# EAGLE board Control (EAGLE 9.1.0)
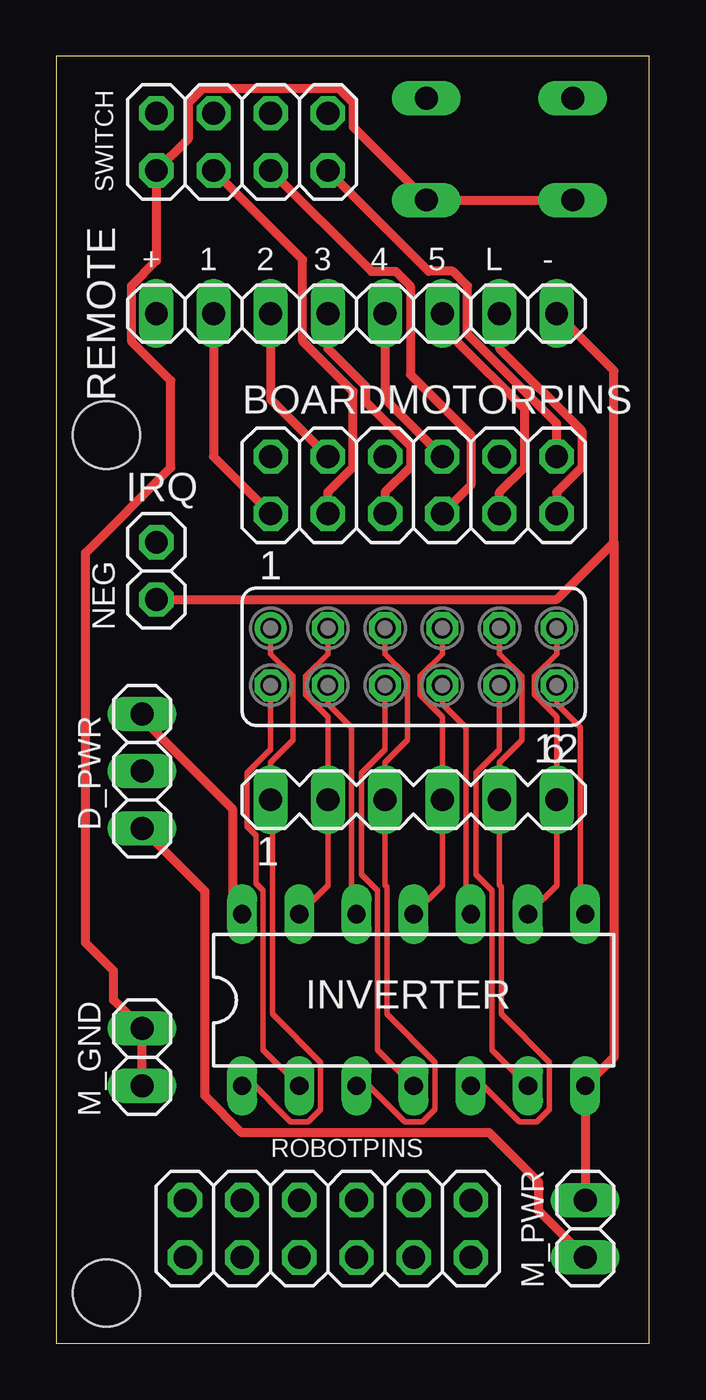
[diagram p0: board, top side]
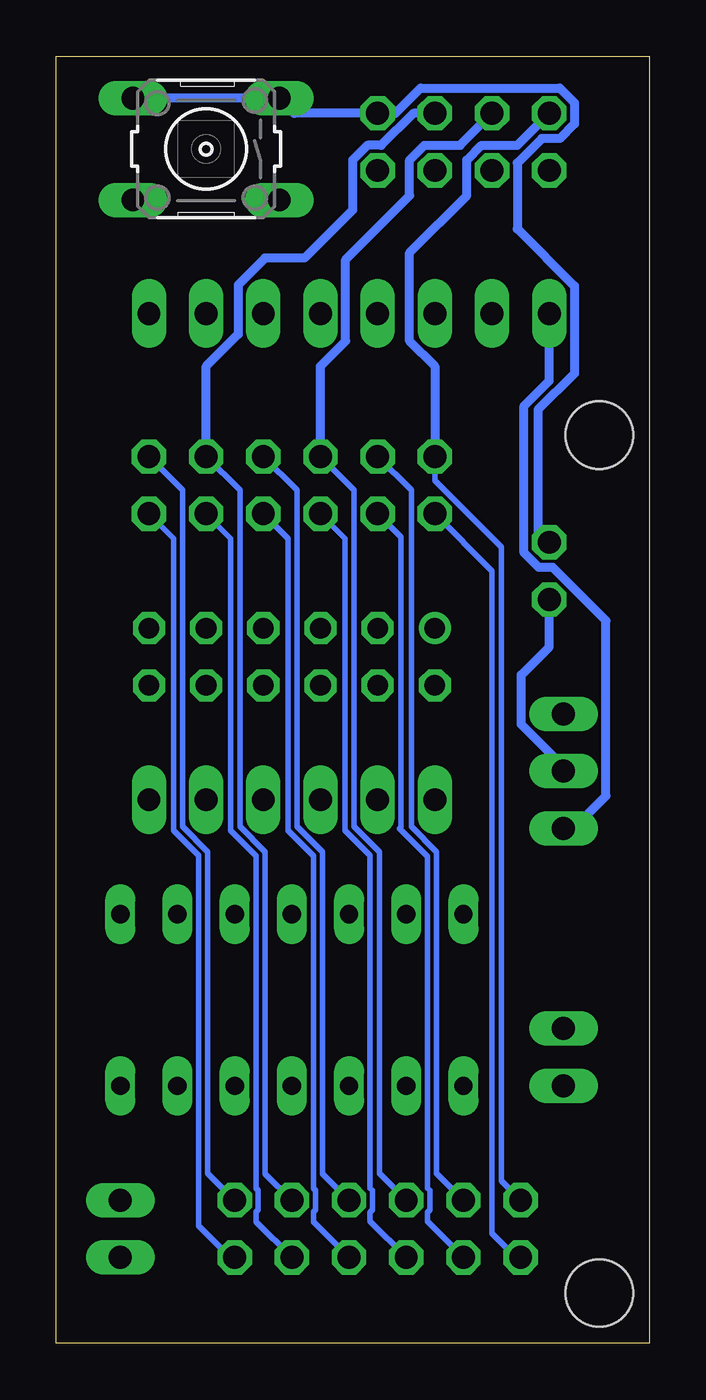
[diagram p1: board, bottom side, seen from below]

Size 26.34 x 57.14 mm. Coordinates in mm from the lower left corner, seen from the top.
Outline: 0,0 26.34,0 26.34,57.14 0,57.14 0,0
Copper layers (1*16): Top 0.035mm / dielectric 1.5mm / Bottom 0.035mm
Design rules "default": minimum track width 6mil, minimum drill 0.35mm, track to track 6mil, track to pad 6mil, pad to pad 6mil, via to via 6mil, smd to smd 6mil, copper to edge 40mil, drill to drill 6mil, minimum pad ring 10mil, minimum via ring 8mil, stop-mask expansion 4mil, vias tented up to drill 0mil, thermal gap 10mil
Holes 3 mm at 2.22,2.22 2.22,40.32

## Footprints (pad centres in the part's own frame; a part is rotated, then mirrored left to right if it is on the bottom)
2X06 = drill 1.016 octagon: 1 -6.35,-1.27; 2 -6.35,1.27; 3 -3.81,-1.27; 4 -3.81,1.27; 5 -1.27,-1.27; 6 -1.27,1.27; 7 1.27,-1.27; 8 1.27,1.27; 9 3.81,-1.27; 10 3.81,1.27; 11 6.35,-1.27; 12 6.35,1.27
1X03 = drill 1.016 long: 1 -2.54,0; 2 0,0; 3 2.54,0
MA06-1 = drill 1.016 long: 1 -6.35,0; 2 -3.81,0; 3 -1.27,0; 4 1.27,0; 5 3.81,0; 6 6.35,0
DIL14 = drill 0.813 long: 1 -7.62,-3.81; 2 -5.08,-3.81; 3 -2.54,-3.81; 4 0,-3.81; 5 2.54,-3.81; 6 5.08,-3.81; 7 7.62,-3.81; 8 7.62,3.81; 9 5.08,3.81; 10 2.54,3.81; 11 0,3.81; 12 -2.54,3.81; 13 -5.08,3.81; 14 -7.62,3.81
1X01 = drill 1.016 octagon: 1 0,0
1X02 = drill 1.016 long: 1 -1.27,0; 2 1.27,0
1X08 = drill 1.016 long: 1 -8.89,0; 2 -6.35,0; 3 -3.81,0; 4 -1.27,0; 5 1.27,0; 6 3.81,0; 7 6.35,0; 8 8.89,0
B3F-10XX = drill 1.016 long: 1 -3.251,2.261; 2 3.251,2.261; 3 -3.251,-2.261; 4 3.251,-2.261
2X04 = drill 1.016 octagon: 1 -3.81,-1.27; 2 -3.81,1.27; 3 -1.27,-1.27; 4 -1.27,1.27; 5 1.27,-1.27; 6 1.27,1.27; 7 3.81,-1.27; 8 3.81,1.27
FE06-2 = drill 0.914: 1 -6.35,1.27 | drill 0.914 octagon: 2 -6.35,-1.27; 3 -3.81,1.27; 4 -3.81,-1.27; 5 -1.27,1.27; 6 -1.27,-1.27; 7 1.27,1.27; 8 1.27,-1.27; 9 3.81,1.27; 10 3.81,-1.27; 11 6.35,1.27; 12 6.35,-1.27

## Placement (x,y rotation side)
BOARDMOTORPINS  [2X06]  15.88,38.1 0 top
D_PWR  [1X03]  3.81,25.4 90 top
DIGITAL_IN  [MA06-1]  15.88,24.13 0 top
INVERTER  74LS04N  [DIL14]  15.88,15.24 0 top
IRQ  [1X01]  4.45,35.56 0 top
M_GND  [1X02]  3.81,12.7 90 top
M_PWR  [1X02]  23.49,5.08 90 top
NEG  [1X01]  4.45,33.02 90 top
REMOTE  [1X08]  13.34,45.72 0 top
ROBOTPINS  [2X06]  12.06,5.08 0 top
S1  [B3F-10XX]  19.68,53.02 180 bottom
SWITCH  [2X04]  8.26,53.34 0 top
TOBOARD  [FE06-2]  15.88,30.48 0 top

## Library data of the parts
BOARDMOTORPINS D_PWR IRQ M_GND M_PWR NEG REMOTE ROBOTPINS SWITCH = pinhead
DIGITAL_IN = con-lstb; OC_FARNELL: unknown; OC_NEWARK: unknown
INVERTER = 74xx-us
S1 = switch-omron; MPN: B3F-1000; OC_FARNELL: 176432; OC_NEWARK: 36M3542
TOBOARD = con-lsta; OC_FARNELL: unknown; OC_NEWARK: unknown

## Nets
GND: D_PWR.2 INVERTER.7 M_PWR.2 NEG.1 REMOTE.8
N$1: DIGITAL_IN.6 INVERTER.9 TOBOARD.11
N$2: DIGITAL_IN.4 INVERTER.11 TOBOARD.7
N$3: DIGITAL_IN.2 INVERTER.13 TOBOARD.3
N$4: DIGITAL_IN.1 INVERTER.1 TOBOARD.1
N$5: DIGITAL_IN.3 INVERTER.3 TOBOARD.5
N$6: DIGITAL_IN.5 INVERTER.5 TOBOARD.9
N$7: INVERTER.2 TOBOARD.2
N$8: INVERTER.4 TOBOARD.6
N$9: INVERTER.6 TOBOARD.10
N$10: INVERTER.8 TOBOARD.12
N$11: INVERTER.10 TOBOARD.8
N$12: INVERTER.12 TOBOARD.4
N$13: BOARDMOTORPINS.1 REMOTE.2 ROBOTPINS.1
N$14: BOARDMOTORPINS.3 ROBOTPINS.3 SWITCH.3
N$15: BOARDMOTORPINS.5 REMOTE.4 ROBOTPINS.5
N$16: BOARDMOTORPINS.7 ROBOTPINS.7 SWITCH.5
N$17: BOARDMOTORPINS.9 REMOTE.6 ROBOTPINS.9
N$18: BOARDMOTORPINS.11 REMOTE.7 ROBOTPINS.11
N$19: BOARDMOTORPINS.12 ROBOTPINS.12 SWITCH.7
N$20: BOARDMOTORPINS.10 ROBOTPINS.10 SWITCH.6
N$21: BOARDMOTORPINS.8 REMOTE.5 ROBOTPINS.8
N$22: BOARDMOTORPINS.2 ROBOTPINS.2 SWITCH.2
N$23: BOARDMOTORPINS.4 REMOTE.3 ROBOTPINS.4
N$24: BOARDMOTORPINS.6 ROBOTPINS.6 SWITCH.4
N$25: D_PWR.1 M_PWR.1 REMOTE.1
N$26: M_GND.1 M_GND.2 S1.1 S1.2 SWITCH.1
N$27: IRQ.1 S1.3 S1.4 SWITCH.8
VCC: D_PWR.3 INVERTER.14

## Tracks (layer width: path | path; a pad name or v marks a point on that pad's centre or on a via)
GND
  Top 0.406: M_PWR.2 INVERTER.7 24.76,12.7 24.76,35.56 | 24.76,35.56 24.76,43.18 REMOTE.8 | NEG.1 22.22,33.02 24.76,35.56
  Bottom 0.406: D_PWR.2 3.81,25.6 5.69,27.48 5.69,29.67 4.45,30.92 NEG.1
N$1
  Top 0.254: INVERTER.9 22.22,20.32 DIGITAL_IN.6 22.22,27.81 21.23,28.8 21.23,29.62 22.22,30.61 TOBOARD.11
N$2
  Top 0.254: INVERTER.11 17.14,20.32 DIGITAL_IN.4 17.14,27.81 16.15,28.8 16.15,29.62 17.14,30.61 TOBOARD.7
N$3
  Top 0.254: INVERTER.13 12.06,20.32 DIGITAL_IN.2 12.06,27.81 11.07,28.8 11.07,29.62 12.06,30.61 TOBOARD.3
N$4
  Top 0.254: TOBOARD.1 9.53,30.61 10.52,29.62 10.52,26.78 9.53,25.79 DIGITAL_IN.1 9.53,23.66 9.6,23.58 9.6,14.61 11.73,12.48 11.73,10.38 11.18,9.83 10.41,9.83 8.53,11.71 INVERTER.1
N$5
  Top 0.254: TOBOARD.5 14.61,30.61 15.6,29.62 15.6,26.78 14.61,25.79 DIGITAL_IN.3 14.61,20.34 14.68,20.27 14.68,14.61 16.81,12.48 16.81,10.38 16.26,9.83 15.49,9.83 13.89,11.43 INVERTER.3
N$6
  Top 0.254: TOBOARD.9 19.68,30.61 20.68,29.62 20.68,26.78 19.68,25.79 DIGITAL_IN.5 19.68,20.34 19.76,20.27 19.76,14.61 21.89,12.48 21.89,10.38 21.34,9.83 20.57,9.83 18.97,11.43 INVERTER.5
N$7
  Top 0.254: TOBOARD.2 9.53,26.36 8.48,25.32 8.48,22.94 8.88,22.54 8.88,20.41 9.2,20.1 9.2,13.03 INVERTER.2
N$8
  Top 0.254: TOBOARD.6 14.61,26.36 13.56,25.32 13.56,20.81 14.28,20.1 14.28,13.03 INVERTER.4
N$9
  Top 0.254: TOBOARD.10 19.68,26.36 18.64,25.32 18.64,20.81 19.35,20.1 19.35,13.03 INVERTER.6
N$10
  Top 0.254: TOBOARD.12 22.22,28.38 23.27,27.34 23.27,19.28 INVERTER.8
N$11
  Top 0.254: TOBOARD.8 17.14,28.38 18.19,27.34 18.19,19.28 INVERTER.10
N$12
  Top 0.254: TOBOARD.4 12.06,28.38 13.11,27.34 13.11,19.28 INVERTER.12
N$13
  Top 0.406: REMOTE.2 6.99,39.37 BOARDMOTORPINS.1
  Bottom 0.254: BOARDMOTORPINS.1 6.99,34.29 6.99,4.88 5.92,3.81 ROBOTPINS.1
N$14
  Top 0.406: BOARDMOTORPINS.3 12.06,37.79 13.18,38.91 13.18,42.26 10.95,44.49 10.95,48.11 SWITCH.3
  Bottom 0.254: BOARDMOTORPINS.3 11.02,35.79 11.02,22.94 11.11,22.85 9.86,21.6 9.86,6.88 9.75,6.78 9.75,5.92 9.86,5.82 9.86,5.41 ROBOTPINS.3
N$15
  Top 0.406: REMOTE.4 12.06,44.17 13.74,42.49 13.74,41.81 15.72,39.83 15.72,38.91 14.61,37.79 BOARDMOTORPINS.5
  Bottom 0.254: BOARDMOTORPINS.5 13.51,35.74 13.51,22.77 12.39,21.65 12.39,6.88 12.29,6.78 12.29,5.92 12.39,5.82 12.39,5.41 ROBOTPINS.5
N$16
  Top 0.406: SWITCH.5 14,47.6 15.07,47.6 15.72,46.95 15.72,43.02 18.41,40.32 18.41,38.1 BOARDMOTORPINS.7
  Bottom 0.254: BOARDMOTORPINS.7 16.05,35.74 16.05,22.77 14.92,21.64 14.92,6.87 14.83,6.78 14.83,5.92 14.92,5.83 14.92,5.4 ROBOTPINS.7
N$17
  Top 0.406: REMOTE.6 17.7,45.16 17.7,44.57 20.8,41.47 20.8,38.91 19.68,37.79 BOARDMOTORPINS.9
  Bottom 0.254: BOARDMOTORPINS.9 18.59,35.74 18.59,22.77 17.46,21.64 17.46,6.87 17.37,6.78 17.37,5.92 17.46,5.83 17.46,5.4 ROBOTPINS.9
N$18
  Top 0.406: REMOTE.7 19.68,44.17 23.34,40.51 23.34,38.91 22.22,37.79 BOARDMOTORPINS.11
  Bottom 0.254: ROBOTPINS.11 18.62,3.81 20.01,5.21 20.01,21.65 21.13,22.77 21.13,35.74 BOARDMOTORPINS.11
N$19
  Top 0.406: SWITCH.7 16.54,47.6 17.61,47.6 18.26,46.95 18.26,44.8 22.22,40.84 BOARDMOTORPINS.12
  Bottom 0.254: BOARDMOTORPINS.12 20.73,37.87 20.73,22.94 19.61,21.82 19.61,7.54 ROBOTPINS.12
N$20
  Bottom 0.254: BOARDMOTORPINS.10 18.19,37.87 18.19,22.94 17.06,21.81 17.06,7.53 ROBOTPINS.10
  Bottom 0.406: BOARDMOTORPINS.10 19.68,43.38 18.26,44.8 18.26,46.99 17.07,48.18 15.32,48.18 13.18,50.32 13.18,52.53 12.53,53.19 11.91,53.19 10.48,54.61 SWITCH.6
N$21
  Top 0.406: REMOTE.5 14.61,41.91 BOARDMOTORPINS.8
  Bottom 0.254: BOARDMOTORPINS.8 15.65,37.87 15.65,22.94 14.52,21.81 14.52,7.53 ROBOTPINS.8
N$22
  Bottom 0.254: BOARDMOTORPINS.2 9.53,38.3 6.58,35.36 6.58,7.21 ROBOTPINS.2
  Bottom 0.406: BOARDMOTORPINS.2 9.53,43.38 10.64,44.49 10.64,48.41 8.1,50.95 8.1,52.53 7.45,53.19 5.87,53.19 SWITCH.2
N$23
  Top 0.406: REMOTE.3 9.53,41.91 BOARDMOTORPINS.4
  Bottom 0.254: BOARDMOTORPINS.4 10.57,37.87 10.57,22.94 9.45,21.82 9.45,7.54 ROBOTPINS.4
N$24
  Bottom 0.254: BOARDMOTORPINS.6 13.11,37.87 13.11,22.94 11.99,21.82 11.99,7.54 ROBOTPINS.6
  Bottom 0.406: BOARDMOTORPINS.6 14.61,43.38 13.49,44.49 13.49,48.11 10.64,50.95 10.64,52.53 9.99,53.19 8.41,53.19 SWITCH.4
N$25
  Top 0.406: M_PWR.1 21.43,5.88 21.43,7.15 19.23,9.35 8.24,9.35 6.6,10.98 6.6,20.07 D_PWR.1
  Bottom 0.406: REMOTE.1 4.45,42.73 5.56,41.62 5.56,35.1 4.91,34.44 4.29,34.44 1.93,32.09 1.93,24.3 3.37,22.86 D_PWR.1
N$26
  Top 0.406: S1.2 S1.1 13.18,54.01 13.18,55.07 12.53,55.73 6.52,55.73 5.87,55.07 5.87,53.49 SWITCH.1 4.45,48.06 3.33,46.95 3.33,44.49 5.08,42.74 5.08,38.88 1.29,35.09 1.29,17.78 2.54,16.54 2.54,15.24 M_GND.2 3.81,12.7 M_GND.1
N$27
  Bottom 0.406: S1.4 S1.3 15.76,54.61 SWITCH.8 11.28,54.61 10.16,55.73 3.98,55.73 3.33,55.07 3.33,54.15 3.98,53.49 4.77,53.49 5.87,52.4 5.87,49.48 3.33,46.95 3.33,43.06 4.94,41.45 4.94,36.05 IRQ.1
VCC
  Top 0.406: D_PWR.3 3.81,27.74 7.83,23.72 7.83,19.47 INVERTER.14

## Text on the board
tNames: + | 1 | 2 | 3 | 4 | 5 | L | -